# Altium PCB QUTMS-BrakeLight--B00-V01.PcbDoc
Units mil, origin at the board's own origin, x right, y up, seen from the top; angles counter-clockwise.
Board outline 3400 x 2000 mil, 2 copper layers (Top Layer, Bottom Layer); 33 components, 16 nets, 158 pads, 11 vias.
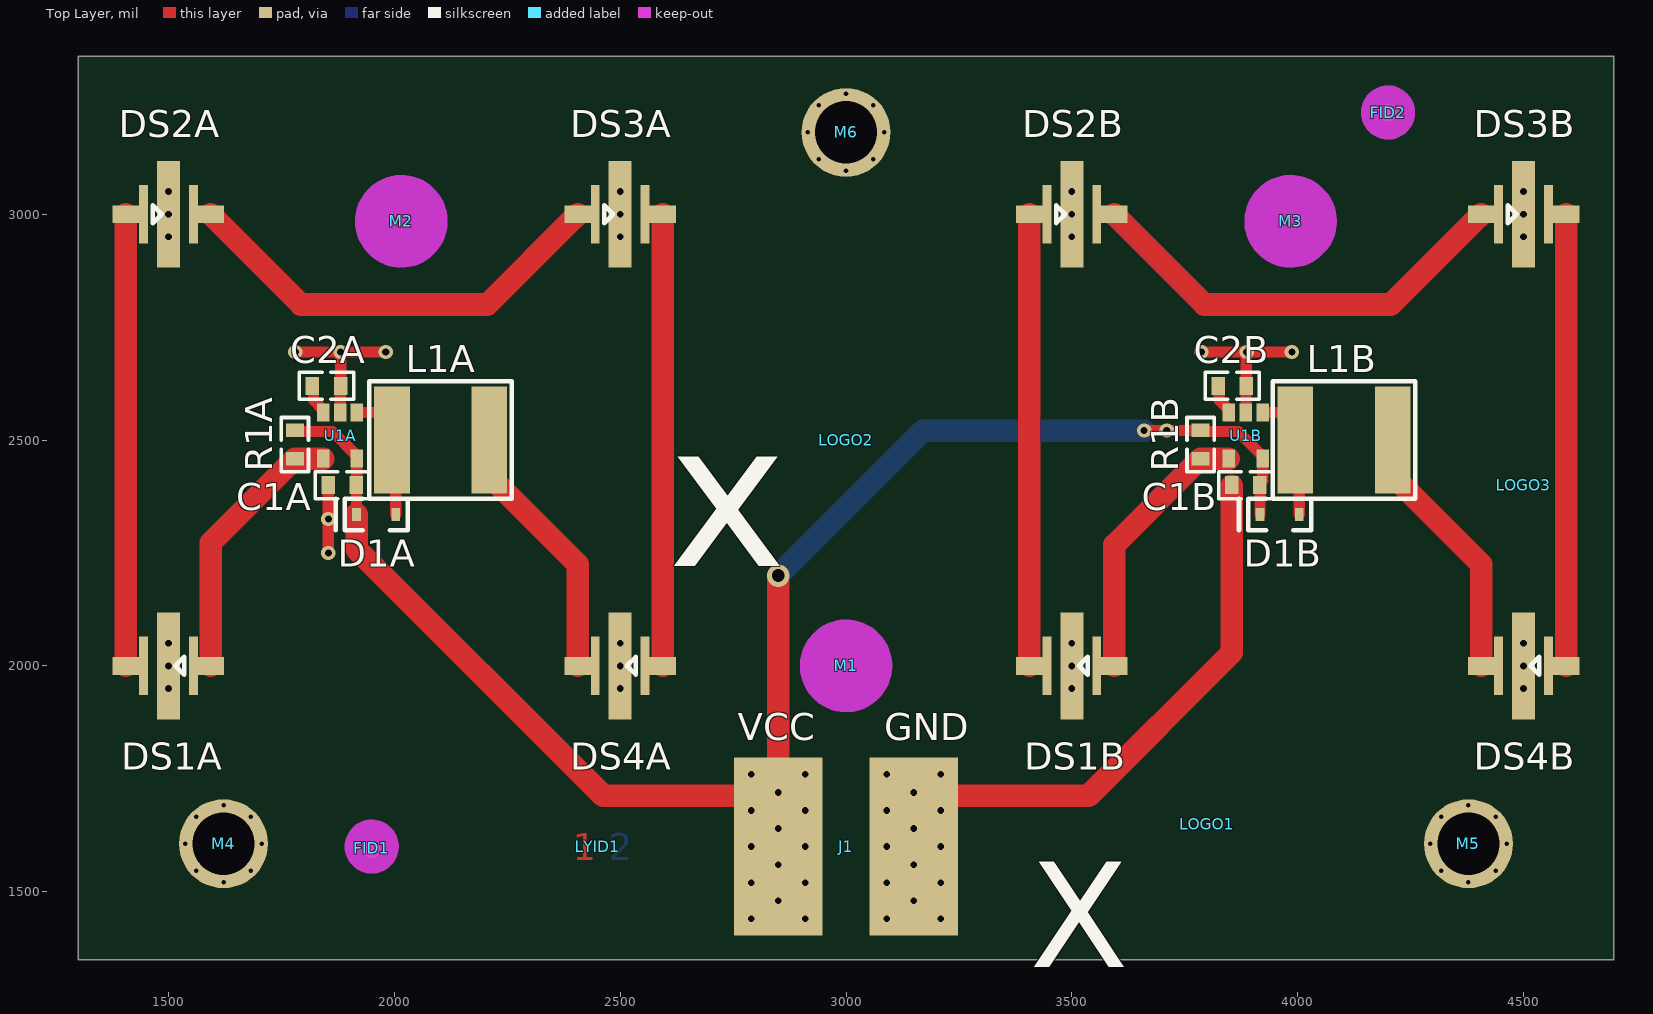
[diagram p0: Top Layer view]
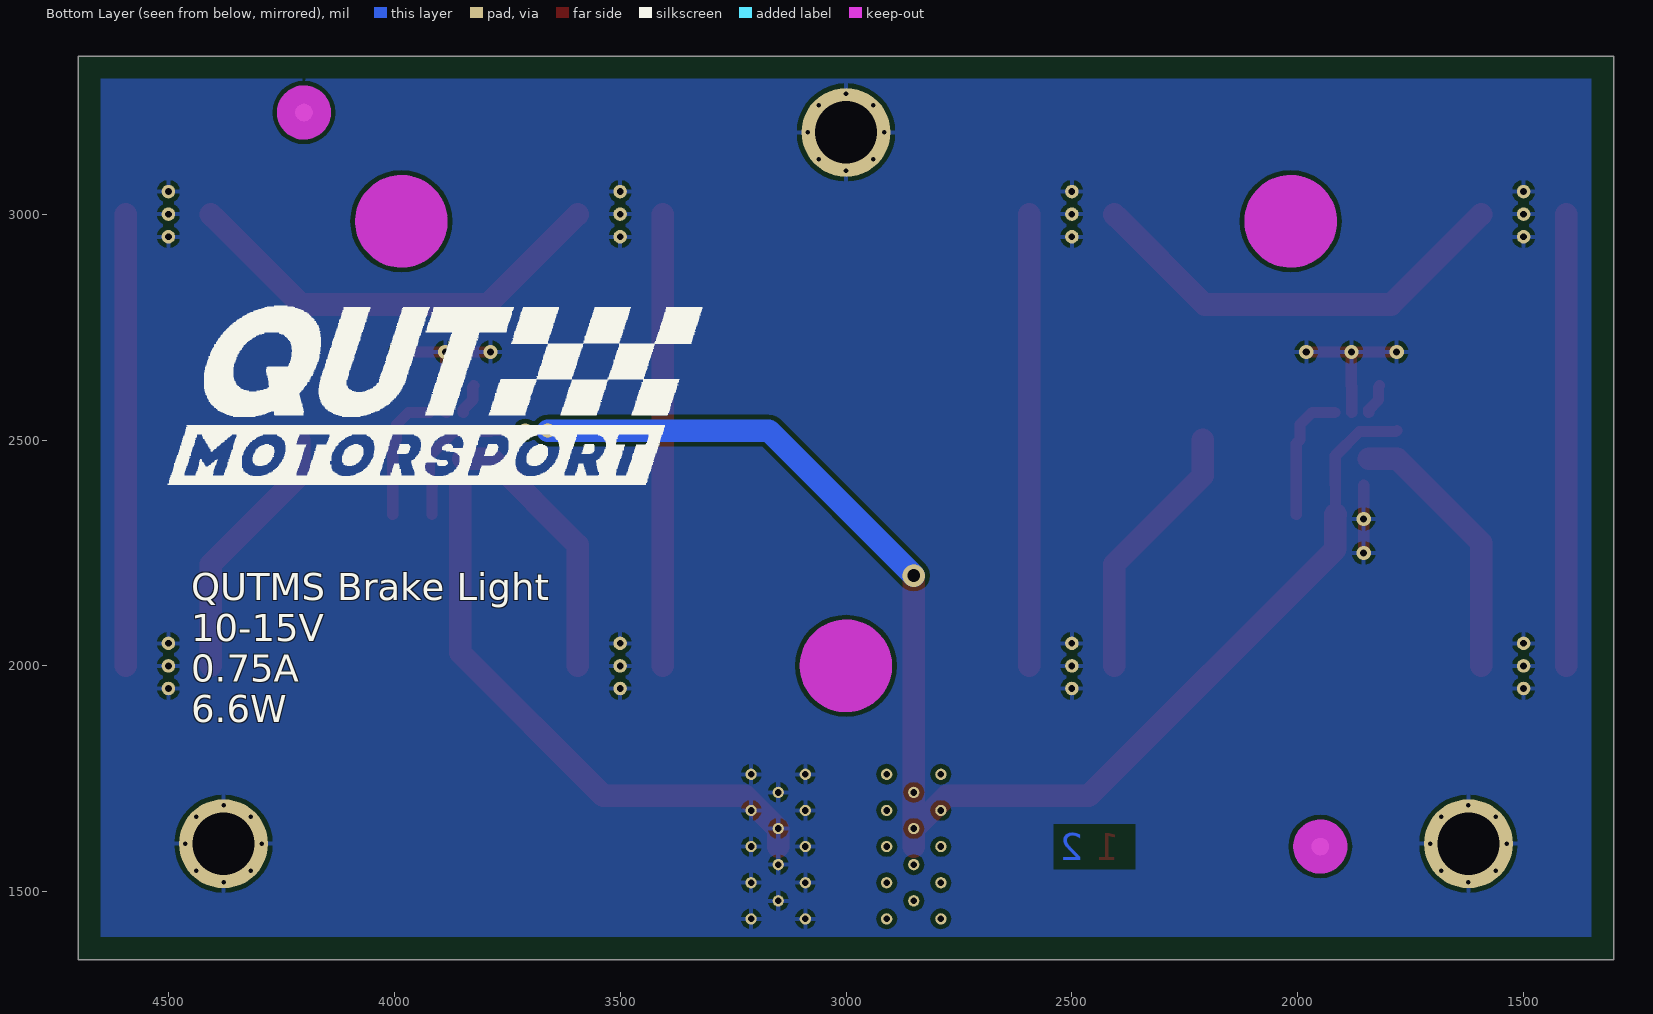
[diagram p1: Bottom Layer view, seen from below]
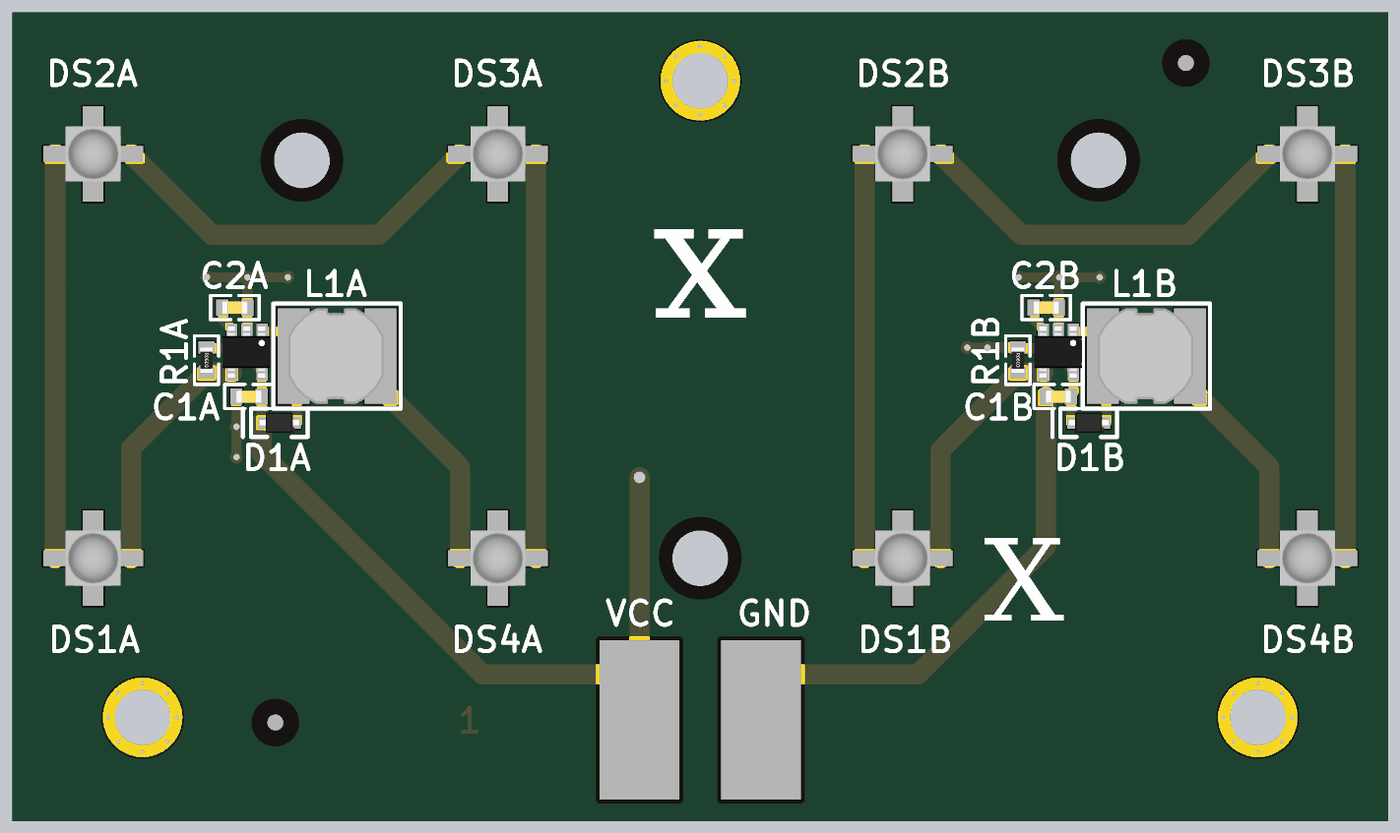
[diagram p2: 3D render of the assembled board from above, using the file's embedded part models]

## Layer stack, top to bottom
Top Solder: solder mask 0.4, Solder Resist, Dk 3.5
Top Layer: signal copper 1.4
Dielectric 1: dielectric 12.6, FR-4, Dk 4.8
Bottom Layer: signal copper 1.4
Bottom Solder: solder mask 0.4, Solder Resist, Dk 3.5

## Board outline
1300,3350 4700,3350 4700,1350 1300,1350

## Design rules (kind name [scope] priority, off if disabled: settings)
Clearance [All] p1: gap=10 ignorepadtopadclearanceinfootprint=FALSE except(0: Arc-Hole Track-Hole SMDPad-Hole THPad-Hole Via-Hole Fill-Hole Poly-Hole Region-Hole Text-Hole; 6: SMDPad-SMDPad)
PolygonConnect [All] p1: connectstyle=Relief reliefconductorwidth=10 reliefentries=4 polygonreliefangle="90 Angle" airgapwidth=10
RoutingVias [All] p1: holewidth=15.75 width=31.5 viastyle="Through Hole" minholewidth=15.75 minwidth=31.5 maxholewidth=15.75 maxwidth=31.5
SolderMaskExpansion [All] p1: expansion=4 istentingtop=FALSE
Width [All] p1: maxlimit=50 minlimit=10 preferedwidth=25 minimp=50.000000 maximp=50.000000 favimp=50.000000
30 further rules are at their usual default settings.

## Classes and differential pairs
component class "LED DRIVERB": C1B C2B D1B L1B R1B U1B
component class "LED DRIVERA": C1A C2A D1A L1A R1A U1A
component class "LED ARRAYA": DS1A DS2A DS3A
channel class QUTMS-BrakeLight-S02-V01: "LED ARRAY A" "LED ARRAY B"
channel class QUTMS-BrakeLight-S01-V01: "LED DRIVER A" "LED DRIVER B"
component class QUTMS-BrakeLight-S00-V01: FID1 FID2 J1 LOGO1 LOGO3 LYID1 M1 M2 M3 M4 M5 M6

## Components (designator, comment, footprint, x,y, rotation, side; value= is the part's Value field where it differs from the comment)
C1A "10uF X7R" Cap_Ceramic_0603 1885,2400 r0 top (schematic designator C1)
C1B "10uF X7R" Cap_Ceramic_0603 3885,2400 r0 top (schematic designator C1)
C2A "4n7" Cap_Ceramic_0603 1850,2620 r180 top (schematic designator C2)
C2B "4n7" Cap_Ceramic_0603 3855,2620 r180 top (schematic designator C2)
D1A "PMEG2005EJ" SOD-323F 1960,2335 r180 top (schematic designator D1)
D1B "PMEG2005EJ" SOD-323F 3960,2335 r180 top (schematic designator D1)
DS1A "Cree XLamp XP-E2 Red" "CREE XLAMP XP-E2" 1500,2000 r180 top (schematic designator DS1)
DS1B "Cree XLamp XP-E2 Red" "CREE XLAMP XP-E2" 3500,2000 r180 top (schematic designator DS1)
DS2A "Cree XLamp XP-E2 Red" "CREE XLAMP XP-E2" 1500,3000 r0 top (schematic designator DS2)
DS2B "Cree XLamp XP-E2 Red" "CREE XLAMP XP-E2" 3500,3000 r0 top (schematic designator DS2)
DS3A "Cree XLamp XP-E2 Red" "CREE XLAMP XP-E2" 2500,3000 r0 top (schematic designator DS3)
DS3B "Cree XLamp XP-E2 Red" "CREE XLAMP XP-E2" 4500,3000 r0 top (schematic designator DS3)
DS4A "Cree XLamp XP-E2 Red" "CREE XLAMP XP-E2" 2500,2000 r180 top (schematic designator DS4)
DS4B "Cree XLamp XP-E2 Red" "CREE XLAMP XP-E2" 4500,2000 r180 top (schematic designator DS4)
FID1 "Fiducial 1MM" "FIDUCIAL 1MM"#1 1950,1600 r0 top
FID2 "Fiducial 1MM" "FIDUCIAL 1MM"#2 4200,3225 r90 top
J1 "Power Input" JUMPER_2WAY_LARGE_SOLDER_PAD 3000,1600 r0 top
L1A "SRN6045" "Bourns Inductor 6x6x4.5mm" 2100,2500 r0 top (schematic designator L1)
L1B "SRN6045" "Bourns Inductor 6x6x4.5mm" 4100,2500 r0 top (schematic designator L1)
LOGO1 "LBL Hot Surface M + TXT" "LBL HOT MEDIUM TXT" 3800,1650 r0 top
LOGO2 "LBL Hot Surface L" "LBL HOT LARGE" 3000,2500 r0 top
LOGO3 "30mm Wide QUTMS Logo" "QUTMS LOGO 30MM" 4500,2400 r180 top
LYID1 "2 Layer Identification PCB Marker" "LAYER IDENT 2" 2450,1600 r0 top
M1 "Hole M3 Loose Unplated" "M3.5 UNPLATED" 3000,2000 r0 top
M2 "Hole M3 Loose Unplated" "M3.5 UNPLATED" 2015.75,2984.25 r0 top
M3 "Hole M3 Loose Unplated" "M3.5 UNPLATED" 3984.25,2984.25 r0 top
M4 "Hole M3 Loose Plated" "M3.5 PLATED" 1622.05,1606.3 r0 top
M5 "Hole M3 Loose Plated" "M3.5 PLATED" 4377.95,1606.3 r0 top
M6 "Hole M3 Loose Plated" "M3.5 PLATED" 3000,3181.1 r0 top
R1A "0R27 1%" Res_ThinFilm_0603 1780,2490 r270 top (schematic designator R1)
R1B "0R27 1%" Res_ThinFilm_0603 3785,2490 r270 top (schematic designator R1)
U1A "AL8860WT-7" TSOT-25 1880,2510 r180 top (schematic designator U1)
U1B "AL8860WT-7" TSOT-25 3885,2510 r180 top (schematic designator U1)

## Footprints (in the part's own frame and the unit in brackets; to place one, negate y for a bottom-side part, rotate by r counter-clockwise, add the part's x,y. Pads: shape width x height; smd on the part's side, far side on the other; paste and mask are expansions set on the pad)
"Bourns Inductor 6x6x4.5mm" [mm]
  rect 2x6 smd: 1(-2.667,0) 2(2.794,0)
  silkscreen extent -3.94,-3.3 4.06,3.3, body extent -3,-3 3,3, height 4.5
Cap_Ceramic_0603 [mil]
  rect 30x40 smd: 1(-31.24,0) 2(31.24,0)
  silkscreen extent -60,-30 60,30, body extent -31,-16 32,16, height 33
"CREE XLAMP XP-E2" [mm]
  rect 1.5x1 smd: A(-2.388,0) K(2.388,0)
  rect 0.5x3.3 smd: A(-1.4,0) K(1.4,0)
  round 0.762 hole 0.381: HS(0,1.27) HS(0,0) HS(0,-1.27)
  rect 1.3x6 smd: HS(0,0)
  silkscreen extent -0.89,-0.51 -0.38,0.51, body extent -1.73,-1.72 1.72,1.73, height 2.31
"FIDUCIAL 1MM"#1 [mm]
  round 1 smd mask+1: 1(0,-0.16)
  round 1 smd far side mask+1: 1(0,0)
  Keep-Out Layer circle w1.524: c0,0 r0.762
"FIDUCIAL 1MM"#2 [mm]
  round 1 smd mask+1: 1(0,0)
  round 1 smd far side mask+1: 1(0,0)
  Keep-Out Layer circle w1.524: c0,0 r0.762
JUMPER_2WAY_LARGE_SOLDER_PAD [mil]
  round 25 hole 15: 1(-210,-160) 1(-210,-80) 1(-210,0) 1(-210,80) 1(-210,160) 1(-150,-120) 1(-150,-40) 1(-150,40) 1(-150,120) 1(-90,-160) 1(-90,-80) 1(-90,0) 1(-90,80) 1(-90,160) 2(90,-160) 2(90,-80) 2(90,0) 2(90,80) 2(90,160) 2(150,-120) 2(150,-40) 2(150,40) 2(150,120) 2(210,-160) 2(210,-80) 2(210,0) 2(210,80) 2(210,160)
  rect 196.85x393.7 smd mask+10: 1(-150,0) 2(150,0)
"LAYER IDENT 2" [mil]
  Top Layer pour cut-out: 190,150
  Top Layer pour cut-out: -90,50 -90,-50 90,-50 90,50
  Top Layer pour cut-out: -10,30
  Top Layer pour cut-out: -20,-5
  Bottom Layer pour cut-out: -90,50 -90,-50 90,-50 90,50
"LBL HOT LARGE" [mil]
"LBL HOT MEDIUM TXT" [mil]
"M3.5 PLATED" [mil]
  round 20 hole 10: 1(-85,0) 1(-60,-60) 1(-60,60) 1(0,-85) 1(0,85) 1(60,-60) 1(60,60) 1(85,0)
  round 196.85 hole 137.8: 1(0,0)
"M3.5 UNPLATED" [mm]
  round 0 hole 3.5 unplated mask+2.6: 1(0,0)
  Keep-Out Layer circle w2.667: c0,0 r1.27
"QUTMS LOGO 30MM" [mil]
Res_ThinFilm_0603 [mil]
  rect 30x40 smd: 1(-31.24,0) 2(31.24,0)
  silkscreen extent -60,-30 60,30, body extent -31,-16 32,16, height 18
SOD-323F [mm]
  rect 0.5x0.75 smd: A(-1.1,0) K(1.1,0)
  silkscreen extent -1.78,-0.89 2.29,0.89, body extent -1.25,-0.64 1.25,0.61, height 0.68
TSOT-25 [mm]
  rect 0.7x1 smd mask+0.051: 1(-0.95,-1.3) 2(0,-1.3) 3(0.95,-1.3) 4(0.95,1.3) 5(-0.95,1.3)
  body extent -1.48,-1.6 1.52,1.6, height 0.92

## Part data
C1A C1B: library part "10uF 50V 5% X7R 0603", "Capacitor, Ceramic, SMD, 10uF, 50V, 5%, X7R, 0603"
C2A C2B: library part "4n7 25V 5% X7R 0603", "Capacitor, Ceramic, SMD, 4n7, 25V, 5%, X7R, 0603"
D1A D1B: "PMEG2005EJ,115 -  Schottky Rectifier, 20 V, 500 mA, Single, SOD-323F, 2 Pins, 390 mV", ComponentLink1Description=Element14, ComponentLink1URL=https://au.element14.com/nexperia/pmeg2005ej-115/schottky-rect-20v-0-5a-sod323f/dp/1757760
DS1A DS1B DS2A DS2B DS3A DS3B DS4A DS4B: "XPEBRD-L1-0000-00601 -  High Brightness LED, XLamp XP-E2 Series, Red, 630 nm, 130 °, 62 lm, 1 A", ComponentLink1Description=Element14, ComponentLink1URL=https://au.element14.com/cree/xpebrd-l1-0000-00601/led-smd-xlamp-xpe-e-red-62lm/dp/2335107
J1: library part "Jumper 2Way Side Large Solder Pad", "Jumper 2Way Side Large Solderable Pad"
L1A L1B: "Power Inductor (SMD), 100 µH, 700 mA, Semishielded, 800 mA", ComponentLink1Description=Element14, ComponentLink1URL=https://au.element14.com/bourns/srn6045-101m/inductor-100uh-semi-shielded-power/dp/2061658
LOGO3: library part "QUTMS Logo 30mm"
LYID1: library part "Layer Identification 2"
M1 M2 M3: "M3.5 Hole, No Plating"
M4 M5 M6: "M3.5 Hole, Plated"
R1A R1B: library part "0R27 1% 0603", "ERJ3RQFR27V - SMD Current Sense Resistor, 0273 ohm, ERJ3R Series, 0603 [1608 Metric], 100 mW, ± 1%, Thick Film", ComponentLink1Description=Element14, ComponentLink1URL=https://au.element14.com/tt-electronics-welwyn/lcs0603-r30ft5/current-sense-res-0r3-1-100-mw/dp/2663681
U1A U1B: "AL8860WT-7 -  LED Driver, 1 Output, Buck (Step Down), 4.5 V to 40 V in, 1 MHz switch, PWM, 40V/1 A out, TSOT-25-5"

## Via types
v1: diameter 31.5, hole 15.75, Top Layer to Bottom Layer, tented both sides, 10 vias
v2: diameter 50, hole 28, Top Layer to Bottom Layer, tented both sides, 1 vias

## Nets (pads, with @x,y where several pads share a name; then routed paths per layer and width w, separated by ;. In a path a pad name is that pad's centre, name@x,y a point inside that pad or via, vN(x,y) a via of type N, cw(c..) or ccw(c..) an arc to the next point about the centre after c; other vN are vias at no path point)
GND: C1A.1 C1B.1 C2A.1 C2B.1 DS1A.HS DS1B.HS DS2A.HS DS2B.HS DS3A.HS DS3B.HS DS4A.HS DS4B.HS J1.2 M4.1 M5.1 M6.1 U1A.2 U1B.2 | length 2093.8
  Top Layer w25: v1(1781,2695) v1(1881,2695) ; C1A.1 1853.76,2325.24 v1(1854,2325) v1(1854,2250) ; U1A.2 1880.62,2561.8 1880.62,2619.38 C2A.1 1881.24,2694.76 v1(1881,2695) ; v1(1981,2695) v1(1881,2695) ; v1(3787,2695) v1(3887,2695) ; U1B.2 3885.62,2561.8 3885.62,2619.38 C2B.1 3886.24,2694.24 v1(3887,2695) ; v1(3987,2695) v1(3887,2695)
  Top Layer w50: J1.2@3150,1600 3150,1639.07 3223.43,1712.5 3537.5,1712.5 3853.76,2028.76 C1B.1@3853.76,2399.14
NetC2A_2: C2A.2 U1A.3 | length 68.7
  Top Layer w25: C2A.2 1821.26,2617.5 1821.26,2588.42 1842.6,2567.09 U1A.3
NetC2B_2: C2B.2 U1B.3 | length 68.7
  Top Layer w25: C2B.2 3826.26,2617.5 3826.26,2588.42 3847.6,2567.09 U1B.3
NetDS1A_A: DS1A.A R1A.2 U1A.4 | length 598.4
  Top Layer w50: DS1A.A@1594,2000 1594,2272.76 R1A.2 1780.06,2458.82 U1A.4
NetDS1A_K: DS1A.K DS2A.A | length 1000
  Top Layer w50: DS1A.K@1406,2000 DS2A.A@1406,3000
NetDS1B_A: DS1B.A R1B.2 U1B.4 | length 600.5
  Top Layer w50: DS1B.A@3594,2000 3594,2267.76 R1B.2 3785.06,2458.82 U1B.4
NetDS1B_K: DS1B.K DS2B.A | length 1000
  Top Layer w50: DS1B.K@3406,2000 DS2B.A@3406,3000
NetDS2A_K: DS2A.K DS3A.A | length 978.6
  Top Layer w50: DS2A.K@1594,3000 1594,2999.21 1793.21,2800 2206,2800 2400.69,2994.69 2401.47,2994.69 2406,2999.21 DS3A.A@2406,3000
NetDS2B_K: DS2B.K DS3B.A | length 978.6
  Top Layer w50: DS2B.K@3594,3000 3594,2999.21 3793.21,2800 4206,2800 4400.69,2994.69 4401.47,2994.69 4406,2999.21 DS3B.A@4406,3000
NetDS3A_K: DS3A.K DS4A.A | length 1000
  Top Layer w50: DS4A.A@2594,2000 DS3A.K@2594,3000
NetDS3B_K: DS3B.K DS4B.A | length 1000
  Top Layer w50: DS4B.A@4594,2000 DS3B.K@4594,3000
NetDS4A_K: DS4A.K L1A.2 | length 581.2
  Top Layer w50: L1A.2 2210,2421.26 2406,2225.26 DS4A.K@2406,2000
NetDS4B_K: DS4B.K L1B.2 | length 581.2
  Top Layer w50: L1B.2 4210,2421.26 4406,2225.26 DS4B.K@4406,2000
SWA: D1A.A L1A.1 U1A.1 | length 291.5
  Top Layer w25: U1A.1 1968.13,2561.18 1995,2534.31 L1A.1 2003.31,2491.69 D1A.A
SWB: D1B.A L1B.1 U1B.1 | length 286.5
  Top Layer w25: U1B.1 3968.13,2561.18 3995,2534.31 L1B.1 4003.31,2491.69 D1B.A
VCC: C1A.2 C1B.2 D1A.K D1B.K J1.1 R1A.1 R1B.1 U1A.5 U1B.5 | length 3518.6
  Top Layer w25: R1A.1 1782.24,2519 1863.13,2519 1916.82,2465.31 1916.82,2400.58 C1A.2 1916.46,2399.77 D1A.K@1916.46,2335.23 ; v1(3660,2521) v1(3710,2521) 3710.24,2521.24 R1B.1 3787.24,2519 3868.13,2519 3922.4,2464.72 U1B.5 3922.4,2411.17 3916.24,2405 C1B.2 3916.46,2399.77 3916.46,2335.23 D1B.K
  Top Layer w50: D1A.K@1916.46,2335.23 D1A.K 1916.69,2258.31 2462.5,1712.5 2776.57,1712.5 J1.1@2850,1639.07 ; J1.1@2850,1600 J1.1@2850,1639.07 ; v2(2850,2200) 2850,1720 2850,1640 J1.1@2850,1639.07
  Bottom Layer w50: v2(2850,2200) 3171,2521 v1(3660,2521)
pads on no net: FID1.1 FID2.1 M1.1 M2.1 M3.1

## Polygon pours and split planes (outlines as drawn)
GND on Bottom Layer "GND" (solid, pour order 0): 4650,1400 1350,1400 1350,3300 4650,3300

## Silkscreen, mask and mechanical layers (free items; w line width, h text height)
Top Overlay:
  text "VCC" at 2760,1835 h60
  text "GND" at 3085,1835 h60
Bottom Overlay:
  text "QUTMS Brake Light / 10-15V / 0.75A / 6.6W" at 4450,1875 h60

## Text inside footprints (layer, text, board x,y; h text height)
LOGO1: Top Overlay "X" at 3406.3,1256.3 h400
LOGO2: Top Overlay "x" at 2606.3,2106.3 h600
LYID1: Top Layer "1" at 2395,1570 h60; Bottom Layer "2" at 2475,1570 h60